# EAGLE board PiZeroHifi (EAGLE 9.6.1)

Size 100 x 80 mm. Coordinates in mm from the lower left corner, seen from the top.
Outline: 0,0 100,0 100,80 0,80 0,0
Copper layers (1*16): Top 0.035mm / dielectric 1.5mm / Bottom 0.035mm
Design rules "default": minimum track width 6mil, minimum drill 0.35mm, track to track 6mil, track to pad 6mil, pad to pad 6mil, via to via 6mil, smd to smd 6mil, copper to edge 40mil, drill to drill 6mil, minimum pad ring 10mil, minimum via ring 8mil, stop-mask expansion 4mil, vias tented up to drill 0mil, thermal gap 10mil
Net classes: 0 default: width 0.152 mm, clearance 0.152 mm

## Footprints (pad centres in the part's own frame; a part is rotated, then mirrored left to right if it is on the bottom)
CAP8MMX3.5MMX20MM = drill 0.6 square: P$1 0,3.5 | drill 0.6: P$2 0,0
C0603 = smd 1.1 x 1: 1 -0.85,0; 2 0.85,0
EIA3216 = smd 1.4 x 1.6: + 1.4,0; - -1.4,0
RASPBERRYPI_ZERO_THRUHOLE = drill 1 pad 1.778 square: 1 8.37,25.23 | drill 1 pad 1.778: 2 8.37,27.77; 3 10.91,25.23; 4 10.91,27.77; 5 13.45,25.23; 6 13.45,27.77; 7 15.99,25.23; 8 15.99,27.77; 9 18.53,25.23; 10 18.53,27.77; 11 21.07,25.23; 12 21.07,27.77; 13 23.61,25.23; 14 23.61,27.77; 15 26.15,25.23; 16 26.15,27.77; 17 28.69,25.23; 18 28.69,27.77; 19 31.23,25.23; 20 31.23,27.77; 21 33.77,25.23; 22 33.77,27.77; 23 36.31,25.23; 24 36.31,27.77; 25 38.85,25.23; 26 38.85,27.77; 27 41.39,25.23; 28 41.39,27.77; 29 43.93,25.23; 30 43.93,27.77; 31 46.47,25.23; 32 46.47,27.77; 33 49.01,25.23; 34 49.01,27.77; 35 51.55,25.23; 36 51.55,27.77; 37 54.09,25.23; 38 54.09,27.77; 39 56.63,25.23; 40 56.63,27.77 | hole 2.75: 3.5,3.5; 3.5,26.5; 61.5,3.5; 61.5,26.5
TERM-4P-SIDE-5.08MM = drill 1 pad 2.54 square: P$1 0,5.08 | drill 1 pad 2.54: P$2 0,0; P$3 0,-5.08; P$4 0,-10.16
JST-4-PTH = drill 0.7 pad 1.6 square: 1 -3,0 | drill 0.7 pad 1.6: 2 -1,0; 3 1,0; 4 3,0
R0603 = smd 1 x 1.1: 1 -0.85,0; 2 0.85,0
VFSOP-8 = smd 0.25 x 0.65: P$1 -0.75,-1.45; P$2 -0.25,-1.45; P$3 0.25,-1.45; P$4 0.75,-1.45; P$5 0.75,1.45; P$6 0.25,1.45; P$7 -0.25,1.45; P$8 -0.75,1.45
LGA-16-3X3 = smd 0.7 x 0.28: 1 -1.4,1; 2 -1.4,0.5; 3 -1.4,0; 4 -1.4,-0.5; 5 -1.4,-1; 9 1.4,-1; 10 1.4,-0.5; 11 1.4,0; 12 1.4,0.5; 13 1.4,1 | smd 0.28 x 0.7: 6 -0.5,-1.4; 7 0,-1.4; 8 0.5,-1.4; 14 0.5,1.4; 15 0,1.4; 16 -0.5,1.4
GHI-IC_SOT23-5(MICROCHIP) = smd 0.6 x 1.1: 1 -0.95,-1.4; 2 0,-1.4; 3 0.95,-1.4; 4 0.95,1.4; 5 -0.95,1.4
TSSOP20-0.65-6.5X4.4MM = smd 0.35 x 1.5: 1 -2.925,-3.065; 2 -2.275,-3.065; 3 -1.625,-3.065; 4 -0.975,-3.065; 5 -0.325,-3.065; 6 0.325,-3.065; 7 0.975,-3.065; 8 1.625,-3.065; 9 2.275,-3.065; 10 2.925,-3.065; 11 2.91,3.065; 12 2.26,3.065; 13 1.61,3.065; 14 0.96,3.065; 15 0.325,3.065; 16 -0.325,3.065; 17 -0.975,3.065; 18 -1.625,3.065; 19 -2.275,3.065; 20 -2.925,3.065
SOP-16 = smd 0.5 x 2.2: 1 -4.445,-3.55; 2 -3.185,-3.55; 3 -1.915,-3.55; 4 -0.645,-3.55; 5 0.635,-3.55; 6 1.895,-3.55; 7 3.165,-3.55; 8 4.435,-3.55; 9 4.445,3.55; 10 3.175,3.55; 11 1.905,3.55; 12 0.635,3.55; 13 -0.635,3.55; 14 -1.905,3.55; 15 -3.175,3.55; 16 -4.445,3.55
TSSOP14 = smd 0.305 x 0.991: 1 -1.95,-2.918; 2 -1.3,-2.918; 3 -0.65,-2.918; 4 0,-2.918; 5 0.65,-2.918; 6 1.3,-2.918; 7 1.95,-2.918; 8 1.95,2.918; 9 1.3,2.918; 10 0.65,2.918; 11 0,2.918; 12 -0.65,2.918; 13 -1.3,2.918; 14 -1.95,2.918

## Placement (x,y rotation side)
C1  1500uF  [CAP8MMX3.5MMX20MM]  -36.83,24.13 0 top  (outside the outline)
C2  2.2nF  [C0603]  -17.78,57.15 0 top  (outside the outline)
C3  0.1uF  [C0603]  -24.13,57.15 0 top  (outside the outline)
C4  10uF  [EIA3216]  -26.67,67.31 0 top  (outside the outline)
C5  0.1uF  [C0603]  -30.48,57.15 0 top  (outside the outline)
C6  2.2uF  [C0603]  -36.83,57.15 0 top  (outside the outline)
C7  1uF  [C0603]  -16.51,67.31 0 top  (outside the outline)
C8  2.2uF  [C0603]  -43.18,57.15 0 top  (outside the outline)
C9  1uF  [C0603]  -21.59,67.31 0 top  (outside the outline)
C10  2.2nF  [C0603]  -49.53,57.15 0 top  (outside the outline)
C11  0.1uF  [C0603]  -55.88,57.15 0 top  (outside the outline)
C12  470p  [C0603]  -43.18,62.23 0 top  (outside the outline)
C13  1uF  [C0603]  -48.26,62.23 0 top  (outside the outline)
C14  1uF  [C0603]  -53.34,62.23 0 top  (outside the outline)
C15  1uF  [C0603]  -58.42,62.23 0 top  (outside the outline)
C16  1500uF  [CAP8MMX3.5MMX20MM]  -36.83,33.02 0 top  (outside the outline)
C17  0.1uF  [C0603]  -17.78,62.23 0 top  (outside the outline)
C18  0.1uF  [C0603]  -24.13,62.23 0 top  (outside the outline)
C19  10uF  [EIA3216]  -33.02,67.31 0 top  (outside the outline)
C20  10uF  [EIA3216]  -39.37,67.31 0 top  (outside the outline)
C21  10uF  [EIA3216]  -45.72,67.31 0 top  (outside the outline)
C22  0.1uF  [C0603]  -30.48,62.23 0 top  (outside the outline)
C23  0.1uF  [C0603]  -36.83,62.23 0 top  (outside the outline)
CON1  RPI-ZEROPI-ZERO-THRUHOLE  [RASPBERRYPI_ZERO_THRUHOLE]  0,0 0 top
CON3  Audio Out  [TERM-4P-SIDE-5.08MM]  0,-67.31 0 top  (outside the outline)
J1  GROVEGROVE-HORIZONTAL  [JST-4-PTH]  40.18,41.91 0 top
J2  GROVEGROVE-HORIZONTAL  [JST-4-PTH]  74.47,44.45 0 top
J3  GROVEGROVE-HORIZONTAL  [JST-4-PTH]  74.47,3.81 0 top
R1  10K  [R0603]  -45.72,-26.67 0 top  (outside the outline)
R7  1K  [R0603]  -55.88,50.8 0 top  (outside the outline)
R8  143K  [R0603]  -44.45,41.91 0 top  (outside the outline)
R9  143K  [R0603]  -50.8,41.91 0 top  (outside the outline)
R10  470  [R0603]  -55.88,41.91 0 top  (outside the outline)
R11  470  [R0603]  -52.07,50.8 0 top  (outside the outline)
R12  10K  [R0603]  -16.51,50.8 0 top  (outside the outline)
R13  10K  [R0603]  -21.59,50.8 0 top  (outside the outline)
R14  1K  [R0603]  -26.67,50.8 0 top  (outside the outline)
R15  10K  [R0603]  -31.75,50.8 0 top  (outside the outline)
R16  1K  [R0603]  -36.83,50.8 0 top  (outside the outline)
U1  TXS0102  [VFSOP-8]  -49.53,67.31 0 top  (outside the outline)
U2  LSM6DS33  [LGA-16-3X3]  -38.1,43.18 0 top  (outside the outline)
U3  TC1014-3.3V  [GHI-IC_SOT23-5(MICROCHIP)]  -45.72,34.29 0 top  (outside the outline)
U4  PCM5101A  [TSSOP20-0.65-6.5X4.4MM]  -26.67,5.08 0 top  (outside the outline)
U5  PAM8403  [SOP-16]  -36.83,5.08 0 top  (outside the outline)
U6  TXB0104PWR  [TSSOP14]  -54.61,-8.89 0 top  (outside the outline)

## Library data of the parts
C1 C4 C16 C19-C21 CON3 U3 = HappyBrackets
C2 C3 C5-C15 C17 C18 C22 C23 = rcl; SPICEPREFIX: C
CON1 = HappyBrackets; MPN: ADA2243
J1-J3 = HappyBrackets; OC_FARNELL: unknown
R1 = adafruit; MF: YAGEO; MPN: RC0603FR-0710KL; OC_FARNELL: 2133286
R7-R16 U1 = adafruit
U2 = HappyBrackets; DIGIKEY: 497-15996-1-ND; MPN: LSM6DS33TR
U4 = HappyBrackets; DIGIKEY: 296-36706-1-ND; MPN: PCM5101APWR
U5 = HappyBrackets; DIGIKEY: PAM8403DRDICT-ND; MPN: PAM8403DR
U6 = adafruit; MF: TEXAS INSTRUMENTS; MPN: TXB0104PWR; OC_FARNELL: 1607891

## Nets
+3V3: C3.1 C17.2 C19.+ CON1.1 CON1.17 U1.P$3 U2.1 U2.4 U2.5 U2.16 U4.17 U4.20 U6.1
+5V: C1.P$1 C13.1 C14.1 C15.1 C16.P$1 CON1.2 CON1.4 J1.3 J2.3 J3.3 R16.2 U1.P$7 U3.1 U3.3 U5.4 U5.6 U5.13 U6.14
/MUTE: CON1.36 R12.2 R13.2
ACCEL_INT_1: CON1.11 U2.6
ACCEL_INT_2: CON1.13 U2.7
AN3V3: C4.+ C5.2 C21.+ C22.2 U3.5 U4.1 U4.8
GND: C1.P$2 C2.2 C3.2 C4.- C5.1 C6.2 C10.2 C11.2 C12.1 C13.2 C14.2 C15.2 C16.P$2 C17.1 C18.2 C19.- C20.- C21.- C22.1 C23.1 CON1.6 CON1.9 CON1.14 CON1.20 CON1.25 CON1.30 CON1.34 CON1.39 J1.4 J2.4 J3.4 R1.1 R7.2 R14.2 R15.1 U1.P$2 U2.8 U2.9 U2.10 U2.11 U2.12 U2.13 U2.15 U3.2 U4.3 U4.9 U4.10 U4.11 U4.12 U4.16 U4.19 U5.2 U5.9 U5.11 U5.15 U6.7
GPI022-OUT: J2.2 U6.11
GPIO21: CON1.29 U6.5
GPIO21-OUT: J2.1 U6.10
GPIO22: CON1.31 U6.4
GPIO23: CON1.33 U6.3
GPIO23-OUT: J1.1 U6.12
GPIO25: CON1.37 U6.2
GPIO25-OUT: J1.2 U6.13
N$1: C8.1 U4.2
N$2: C8.2 U4.4
N$3: C6.1 U4.5
N$4: C18.1 C20.+ U4.18
N$5: R10.1 U4.6
N$6: R11.1 U4.7
N$7: C7.2 R8.1
N$8: C9.1 C10.1 R11.2 R14.1
N$9: C2.1 C7.1 R7.1 R10.2
N$10: C9.2 R9.1
N$11: R8.2 U5.7
N$12: R9.2 U5.10
N$13: C12.2 U3.4
N$14: CON3.P$1 U5.1
N$15: CON3.P$2 U5.3
N$16: CON3.P$3 U5.14
N$17: CON3.P$4 U5.16
N$18: C11.1 U5.8
N$19: R12.1 U5.12
N$20: R13.1 U5.5
N$26: C23.2 R15.2 R16.1 U1.P$6
OE: CON1.38 R1.2 U6.8
PCM_CLK: CON1.12 U4.13
PCM_DOUT: CON1.40 U4.14
PCM_FS: CON1.35 U4.15
SCL: CON1.5 U1.P$4 U2.2
SCL_OUT: J3.1 U1.P$1
SDA: CON1.3 U1.P$5 U2.3
SDA_OUT: J3.2 U1.P$8

## Tracks (layer width: path | path; a pad name or v marks a point on that pad's centre or on a via)
+3V3  (12 unrouted)
+5V  (17 unrouted)
/MUTE  (2 unrouted)
ACCEL_INT_1  (1 unrouted)
ACCEL_INT_2  (1 unrouted)
AN3V3  (6 unrouted)
GND  (55 unrouted)
GPI022-OUT  (1 unrouted)
GPIO21  (1 unrouted)
GPIO21-OUT  (1 unrouted)
GPIO22  (1 unrouted)
GPIO23  (1 unrouted)
GPIO23-OUT  (1 unrouted)
GPIO25  (1 unrouted)
GPIO25-OUT  (1 unrouted)
N$1  (1 unrouted)
N$2  (1 unrouted)
N$3  (1 unrouted)
N$4  (2 unrouted)
N$5  (1 unrouted)
N$6  (1 unrouted)
N$7  (1 unrouted)
N$8  (3 unrouted)
N$9  (3 unrouted)
N$10  (1 unrouted)
N$11  (1 unrouted)
N$12  (1 unrouted)
N$13  (1 unrouted)
N$14  (1 unrouted)
N$15  (1 unrouted)
N$16  (1 unrouted)
N$17  (1 unrouted)
N$18  (1 unrouted)
N$19  (1 unrouted)
N$20  (1 unrouted)
N$26  (3 unrouted)
OE  (2 unrouted)
PCM_CLK  (1 unrouted)
PCM_DOUT  (1 unrouted)
PCM_FS  (1 unrouted)
SCL  (2 unrouted)
SCL_OUT  (1 unrouted)
SDA  (2 unrouted)
SDA_OUT  (1 unrouted)